# Altium PCB PCB1.PcbDoc
Units mm, origin at the board's own origin, x right, y up, seen from the top; angles counter-clockwise.
Board outline 55 x 55 mm, 2 copper layers (Top Layer, Bottom Layer), stack 1.74 mm thick; 47 components, 20 nets, 114 pads, 97 vias.
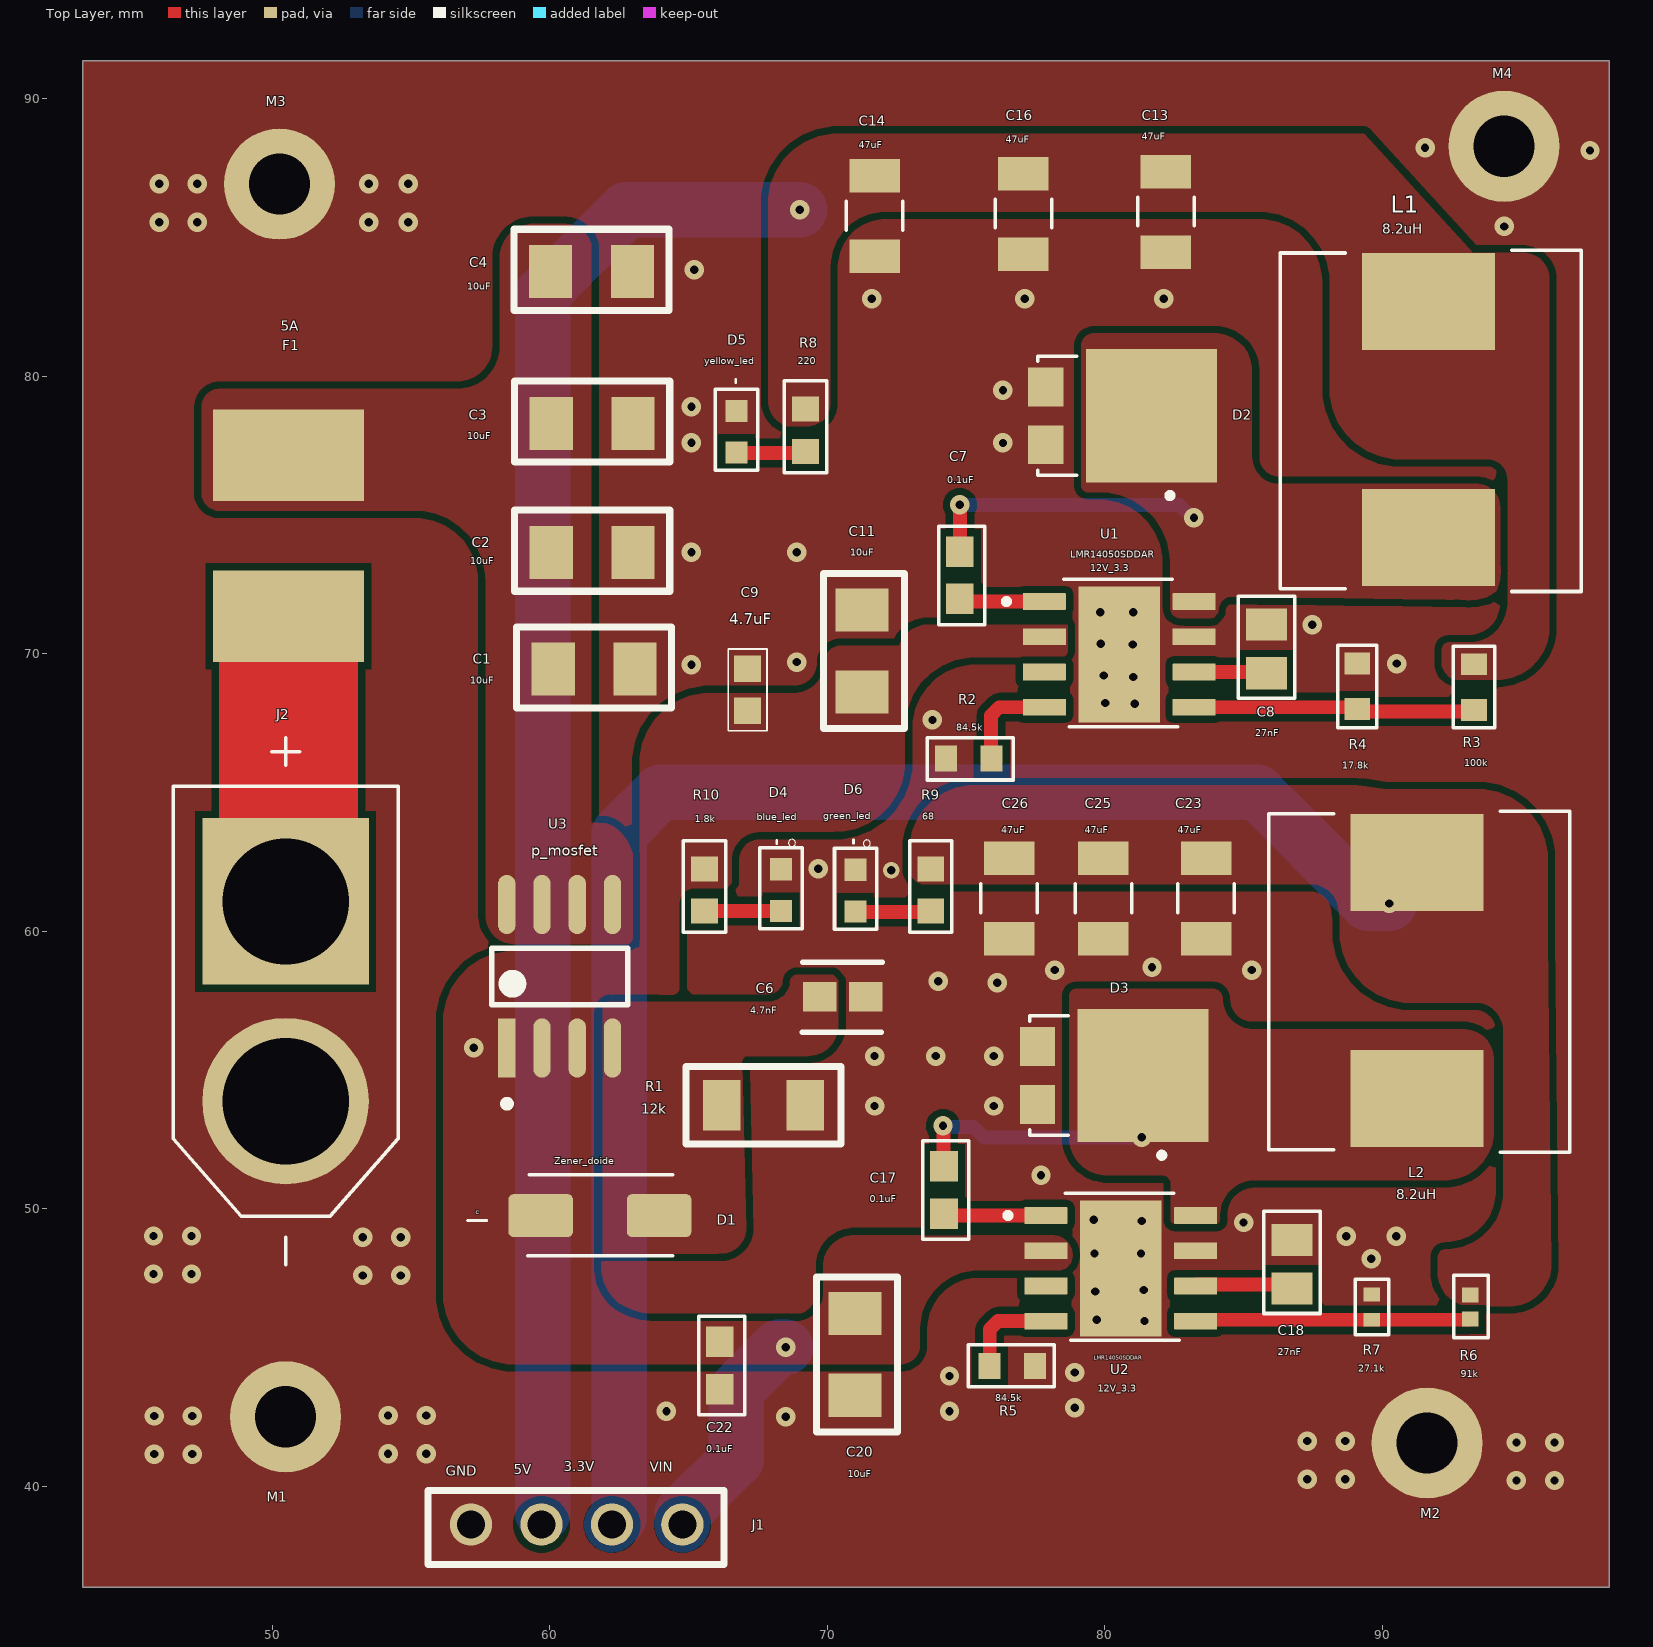
[diagram p0: Top Layer view]
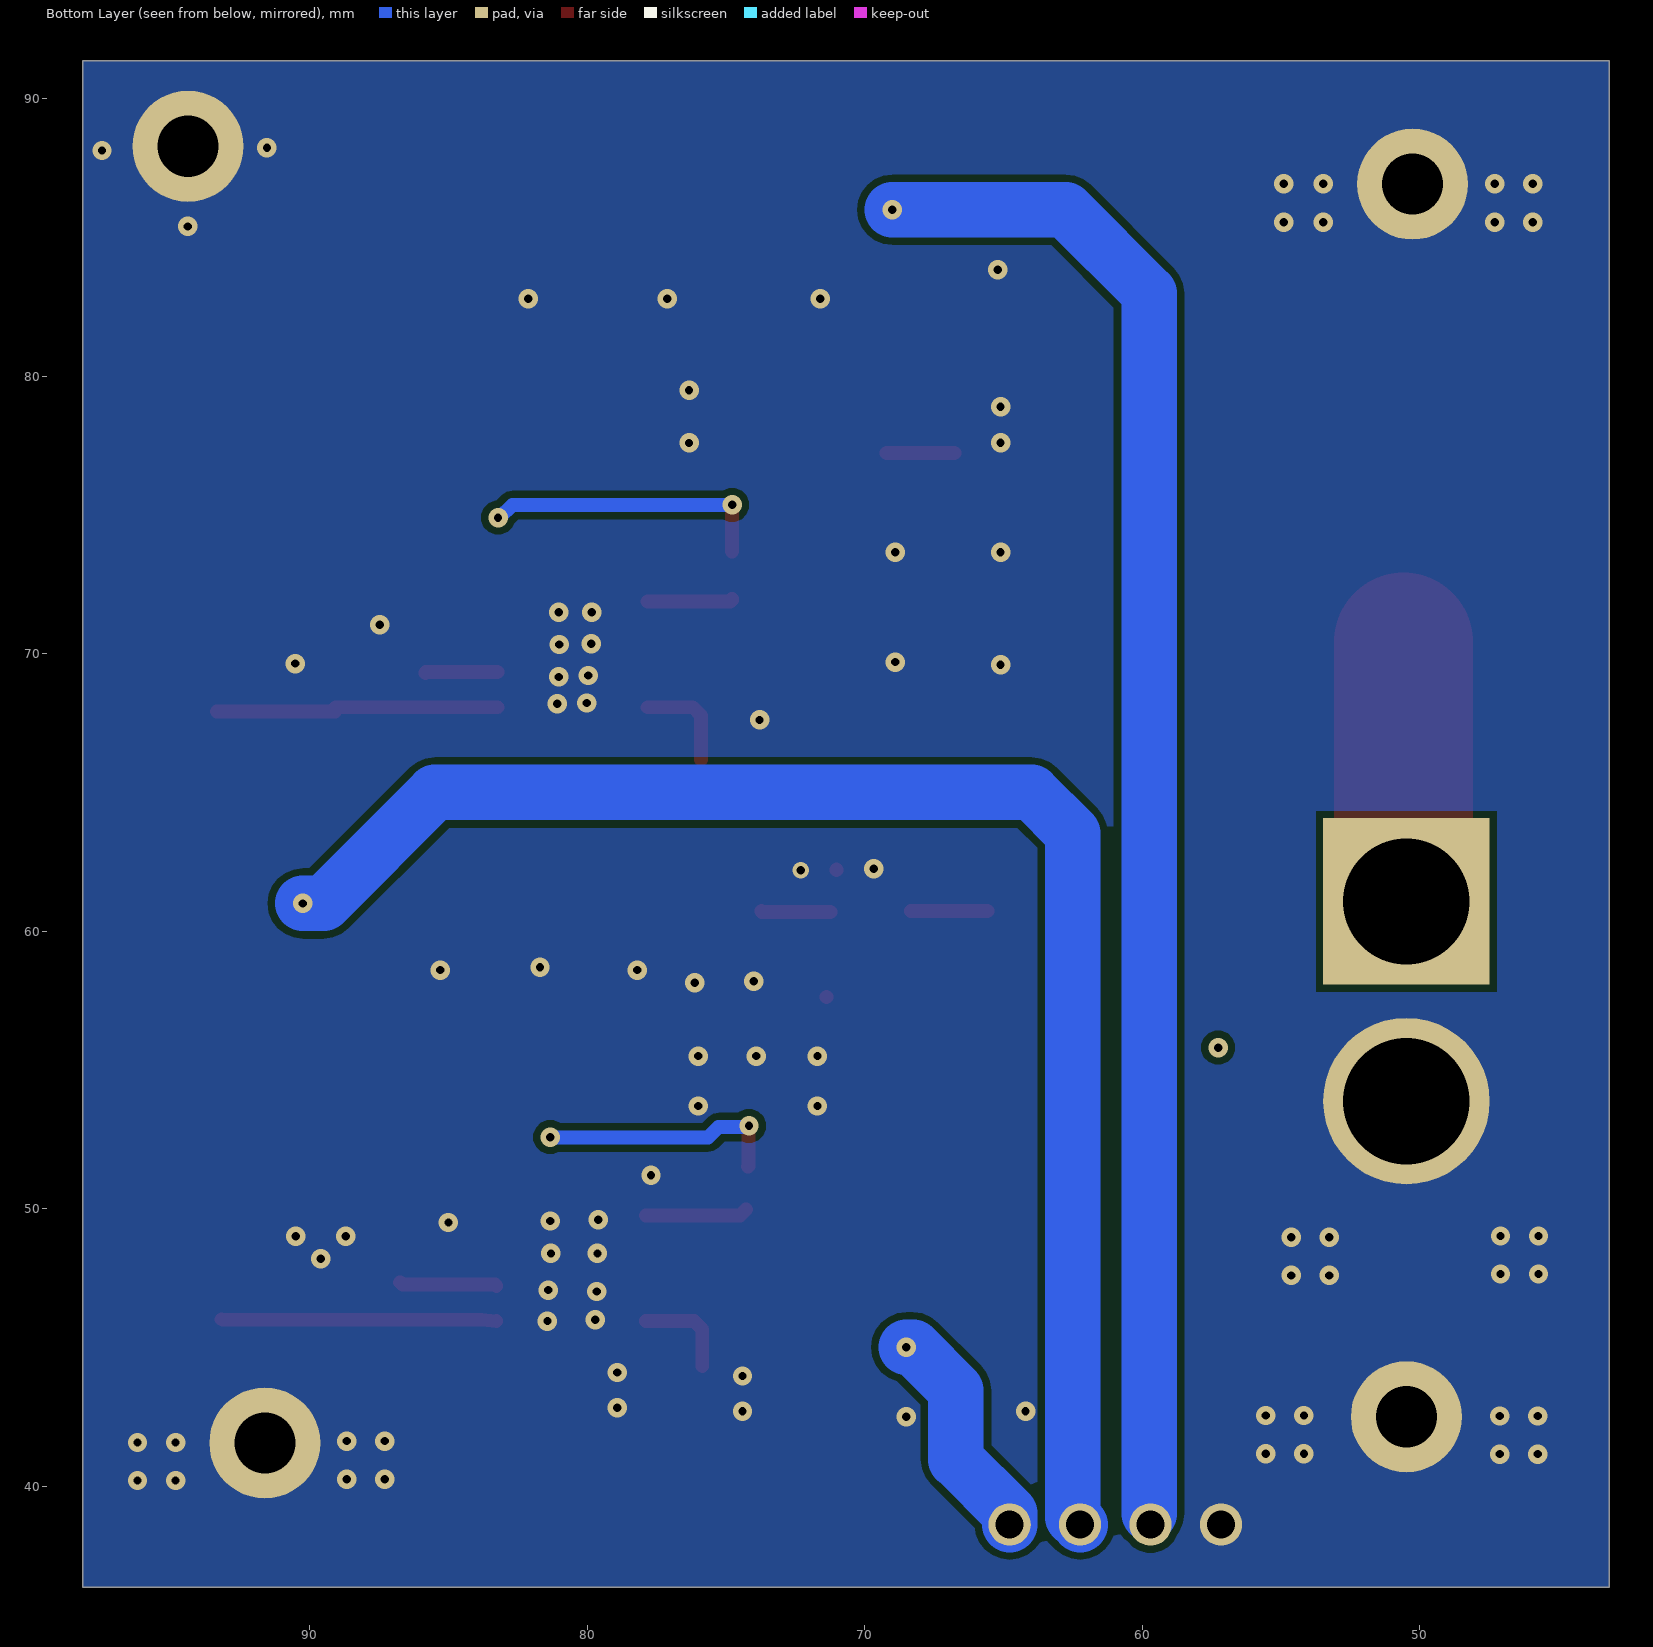
[diagram p1: Bottom Layer view, seen from below]
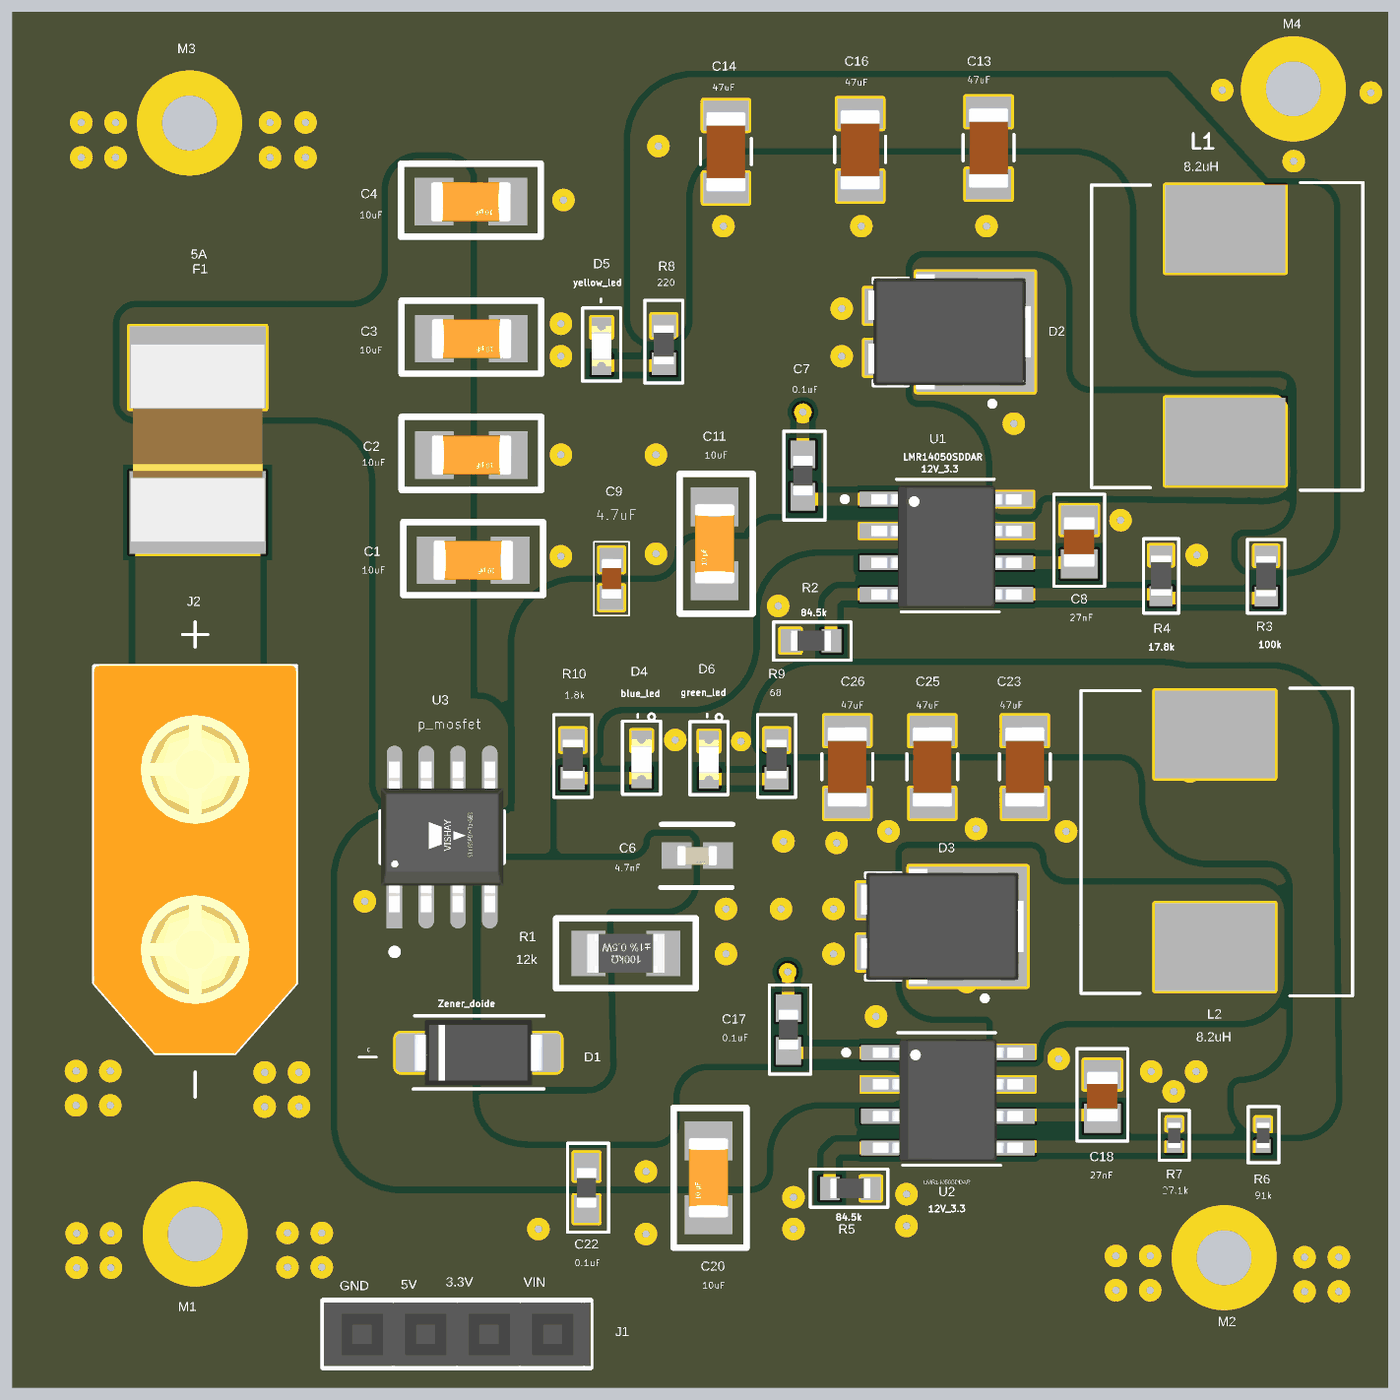
[diagram p2: 3D render of the assembled board from above, using the file's embedded part models]

## Layer stack, top to bottom
Top Solder: solder mask 0.0102, Solder Resist, Dk 3.5
Top Layer: signal copper 0.07
Dielectric 1: dielectric 1.6002, FR-4, Dk 4.8
Bottom Layer: signal copper 0.07
Bottom Solder: solder mask 0.0102, Solder Resist, Dk 3.5

## Board outline
43.171,36.364 43.171,91.364 98.171,91.364 98.171,36.364

## Design rules (kind name [scope] priority, off if disabled: settings)
Clearance [All] p1: gap=0.254 ignorepadtopadclearanceinfootprint=FALSE
HoleSize [All] p1: absolutevalues=TRUE maxlimit=5 minlimit=0.025 maxpercent=80.000 minpercent=20.000
MinimumSolderMaskSliver [All] p1: minsoldermaskwidth=0.2
PolygonConnect [All] p1: connectstyle=Direct reliefconductorwidth=0.254 reliefentries=4 polygonreliefangle="90 Angle" airgapwidth=0.254
RoutingVias [All] p1: holewidth=0.35 width=0.7 viastyle="Through Hole" minholewidth=0.2 minwidth=0.2 maxholewidth=0.3 maxwidth=0.7
SilkToSilkClearance [All] p1: silktosilkclearance=0.15
SilkToSolderMaskClearance [IsPad] p1: minsilkscreentomaskgap=0.15 clearancetoexposedcopper=TRUE
SolderMaskExpansion [All] p1: expansion=0.102 istentingtop=FALSE
SupplyNets "Schematic Supply Nets_4" [InNet('12V')] p1: voltage=0.000
SupplyNets "Schematic Supply Nets_3" [InNet('VIN')] p2: voltage=0.000
SupplyNets "Schematic Supply Nets_2" [InNet('3.3')] p3: voltage=0.000
SupplyNets "Schematic Supply Nets_1" [InNet('GND')] p4: voltage=0.000
SupplyNets "Schematic Supply Nets" [InNet('5V5')] p5: voltage=0.000
Width [All] p1: maxlimit=5 minlimit=0.254 preferedwidth=0.5
26 further rules are at their usual default settings.

## Classes and differential pairs
polygon class PolygonClass_1: 3.3_L01_P023
component class Sheet2: C17 C18 C20 C22 C23 C25 C26 D3 D4 D5 D6 J1 L2 M1 M2 M3 M4 R5 R6 R7 R8 R9 R10 U2
component class Sheet1: C1 C2 C3 C4 C6 C7 C8 C9 C11 C13 C14 C16 D1 D2 F1 J2 L1 R1 R2 R3 R4 U1 U3

## Components (designator, comment, footprint, x,y, rotation, side; value= is the part's Value field where it differs from the comment)
C1 "10uF,50V" CL31A106KBHNNNE 61.544,69.469 r180 top
C2 "10uF,50V" CL31A106KBHNNNE 61.475,73.675 r180 top
C3 "10uF,50V" CL31A106KBHNNNE 61.475,78.325 r180 top
C4 "10uF,50V" CL31A106KBHNNNE 61.45,83.8 r180 top
C6 "4.7nF,50V" C0603C472F5GACTU 70.574,57.608 r180 top
C7 "0.1uf,25V" CC0603KRX7R8BB104 74.825,72.85 r90 top
C8 "27nF,16V" C0805C273K4HACAUTO 85.825,70.175 r90 top
C9 "4.7uF,25V" GRM188R61E475KE11D 67.125,68.7 r270 top
C11 "2.2uF,100V" CL31A106KBHNNNE 71.275,70.15 r90 top
C13 "47uF,10V" GRM31CR61A476ME15L 82.125,85.9 r90 top
C14 "47uF,10V" GRM31CR61A476ME15L 71.625,85.75 r90 top
C16 "47uF,10V" GRM31CR61A476ME15L 76.989,85.829 r90 top
C17 "0.1uf,25V" CC0603KRX7R8BB104 74.25,50.7 r90 top
C18 "27nF,16V" C0805C273K4HACAUTO 86.75,48 r90 top
C20 "2.2uF,100V" CL31A106KBHNNNE 71.025,44.801 r90 top
C22 "0.1uf,25V" CC0603KRX7R8BB104 66.175,44.375 r90 top
C23 "47uF,10V" GRM31CR61A476ME15L 83.575,61.15 r90 top
C25 "47uF,10V" GRM31CR61A476ME15L 79.875,61.15 r90 top
C26 "47uF,10V" GRM31CR61A476ME15L 76.475,61.15 r90 top
D1 "12V" SMAZ12-13-F 61.8,49.7 r0 top
D2 "20V,8A" SS12P2L-M3/86A 79.772,78.575 r270 top
D3 "20V,8A" SS12P2L-M3/86A 79.475,54.8 r270 top
D4 "Blue_led" XL-1608UBC-04 68.375,61.432 r270 top
D5 "yellow_led" XL-1608UWC-04 66.726,78.003 r270 top
D6 "green_led" LTST-C190GKT 71.018,61.462 r270 top
F1 "Fuse,5A" 2920L500/16MR 50.575,74.25 r90 top
J1 "Through Hole,P=2.54mm" PBC04SAAN 60.939,38.616 r180 top
J2 "XT60" XT60-M 50.475,57.475 r270 top
L1 "8.2uH, 7A" SCIHP1040-8R2M 91.669,78.443 r90 top
L2 "8.2uH, 7A" SCIHP1040-8R2M 91.25,58.225 r90 top
M1 "2..2mm" "MOUNTINH HOLE" 50.5,42.5 r0 top
M2 "2..2mm" "MOUNTINH HOLE" 91.643,41.554 r0 top
M3 "2..2mm" "MOUNTINH HOLE" 50.275,86.925 r0 top
M4 "2..2mm" "MOUNTINH HOLE" 94.411,88.29 r0 top
R1 "12K,0.5W" CRGP1206F12K 67.725,53.7 r180 top
R2 "84.5k,100mW" RC0603FR-0784K5L 75.1,66.225 r0 top
R3 "100k, 0.1W" RT0603CRC07100KL 93.3,68.8 r90 top
R4 "17.8kohm,100mw" RC0603FR-0717K8L 89.1,68.825 r270 top
R5 "84.5k,100mW" RC0603FR-0784K5L 76.67,44.325 r180 top
R6 "91K,62mW" RC0402FR-0791KL 93.175,46.449 r90 top
R7 "27.1k,63mW" TNPW040227K1BEED 89.625,46.449 r270 top
R8 "220,100mW" RMCF0603JT220R 69.215,78.054 r90 top
R9 "68,100mW" RC0603JR-0768RL 73.725,61.49 r90 top
R10 "1.8K,100mW" RMCF0603JT1K80 65.575,61.49 r90 top
U1 "DC-DC Buck Regulator, 5 A" LMR14050SDDAR 80.521,69.977 r0 top
U2 "DC-DC Buck Regulator, 5 A" LMR14050SDDAR 80.575,47.85 r0 top
U3 "P channel mosfet" SI4435FDY-T1-GE3 60.4,58.381 r90 top

## Footprints (in the part's own frame and the unit in brackets; to place one, negate y for a bottom-side part, rotate by r counter-clockwise, add the part's x,y. Pads: shape width x height; smd on the part's side, far side on the other; paste and mask are expansions set on the pad)
2920L500/16MR [mm] "C207091"
  rect 3.3x5.45 smd: 1(-2.9,0) 2(2.9,0)
  body extent -4.06,-2.67 3.81,2.67, height 1.52
C0603C472F5GACTU [mil] "50V 4.7nF C0G 0603 Ceramic Capacitors ROHS"
  rect 47.5x41.66 smd paste+0 mask+0: 1(-31.53,-0.98) 2(33.5,-0.98)
  silkscreen extent -55,-50 58,49, body extent -75,-42 77,40, height 10
C0805C273K4HACAUTO [mm] "16V 27nF X8R ±10% 0805 Ceramic Capacitors ROHS"
  rect 1.16x1.47 smd: 1(-0.875,0) 2(0.875,0)
  silkscreen extent -1.78,-1.02 1.91,1.02, body extent -1,-0.62 1,0.63, height 1.2
CC0603KRX7R8BB104 [mm] "25V 100nF X7R ±10% 0603 Ceramic Capacitors ROHS"
  rect 1.1x1 smd: 1(-0.875,0.05) 2(0.825,0.05)
  silkscreen extent -1.8,-0.84 1.75,0.81, body extent -0.83,-0.35 0.77,0.45, height 0.9
CL31A106KBHNNNE [mm] "50V 10uF X5R ±10% 1206 Ceramic Capacitors ROHS"
  rect 1.554x1.906 smd paste+0 mask+0: 1(-1.526,0.025) 2(1.426,0.025)
  silkscreen extent -2.84,-1.5 2.74,1.42, body extent -2.8,-1.43 2.7,1.48, height 0.25
CRGP1206F12K [mm] "12 kOhms ±1% 0.5W, 1/2W Chip Resistor 1206 (3216 Metric) Automotive AEC-Q200, Pulse Withstanding Thick Film"
  rect 1.356x1.81 smd paste+0 mask+0: 1(-1.476,-0.025) 2(1.526,-0.025)
  silkscreen extent -2.77,-1.42 2.82,1.37, body extent -2.65,-1.43 2.7,1.38, height 0.25
GRM31CR61A476ME15L [mm] "10V 47uF X5R ±20% 1206 Ceramic Capacitors ROHS"
  rect 1.21x1.82 smd: 1(-1.425,-0.075) 2(1.475,-0.075)
  silkscreen extent -0.48,-1.09 0.56,0.94, body extent -1.57,-0.88 1.63,0.72, height 1.8
GRM188R61E475KE11D [mm] "25V 4.7uF X5R ±10% 0603 Ceramic Capacitors ROHS"
  rect 0.96x0.97 smd: 1(-0.755,0) 2(0.755,0)
  silkscreen extent -1.48,-0.7 1.48,0.7, body extent -0.8,-0.4 0.8,0.4, height 0.95
LMR14050SDDAR [mm] "SIMPLE SWITCHER® 40-V, 5-A, 2.2-MHz step-down converter with 40-μA IQ"
  rrect5% 1.55x0.6 smd mask+0: 1(-2.7,1.905) 2(-2.7,0.635) 3(-2.7,-0.635) 4(-2.7,-1.905) 5(2.7,-1.905) 6(2.7,-0.635) 7(2.7,0.635) 8(2.7,1.905)
  rect 2.95x4.9 smd paste-3 mask+0: 9(0,0)
  silkscreen extent -4.17,-2.6 2.1,2.7, body extent -3,-2.45 3,2.45, height 1.7
LTST-C190GKT [mm] "20mA Yellow Green 2.1V 100mW 0603 LED Indication - Discrete ROHS"
  rect 0.8x0.8 smd: A(0.75,0) C(-0.75,0)
  silkscreen extent -1.84,-0.76 1.4,0.76, body extent -0.8,-0.4 0.8,0.4, height 0.81
"MOUNTINH HOLE" [mm] "2.2mm"
  round 4 hole 2.2: 1(-0.025,0)
PBC04SAAN [mil]
  round 60 hole 40 paste-99999 mask+0: 1(-150.98,-0.02) 2(-50.98,-0.02) 3(49.02,-0.02) 4(149.02,-0.02)
  silkscreen extent -210,-48 210,57, body extent -211,-45 209,55, height 335
RC0402FR-0791KL [mm] "91kΩ 62.5mW 50V ±100ppm/℃ Thick Film Resistor ±1% 0402 Chip Resistor - Surface Mount ROHS"
  rect 0.54x0.6 smd: 1(-0.432,0) 2(0.432,0)
  silkscreen extent -1.1,-0.63 1.14,0.6, body extent -0.5,-0.25 0.5,0.25, height 0.4
RC0603FR-0717K8L [mm] "100mW 17.8kΩ 75V ±100ppm/℃ Thick Film Resistor ±1% 0603 Chip Resistor - Surface Mount ROHS"
  rect 0.79x0.93 smd: 1(-0.82,0) 2(0.82,0)
  silkscreen extent -1.48,-0.7 1.5,0.7, body extent -0.8,-0.4 0.8,0.4, height 0.55
RC0603FR-0784K5L [mm] "100mW 84.5kΩ 75V ±100ppm/℃ Thick Film Resistor ±1% 0603 Chip Resistor - Surface Mount ROHS"
  rect 0.79x0.93 smd: 1(-0.82,0) 2(0.82,0)
  silkscreen extent -1.5,-0.77 1.6,0.75, body extent -0.8,-0.4 0.8,0.4, height 0.55
RC0603JR-0768RL [mm] "100mW 68Ω 75V ±100ppm/℃ Thick Film Resistor ±5% 0603 Chip Resistor - Surface Mount ROHS"
  rect 0.9x0.97 smd: 1(-0.76,0) 2(0.76,0)
  silkscreen extent -1.52,-0.76 1.78,0.76, body extent -0.77,-0.4 0.77,0.4, height 0.55
RMCF0603JT1K80 [mm] "100mW 1.8kΩ 75V ±200ppm/℃ Thick Film Resistor ±5% 0603 Chip Resistor - Surface Mount ROHS"
  rect 0.9x0.97 smd: 1(-0.76,0) 2(0.76,0)
  silkscreen extent -1.52,-0.76 1.78,0.76, body extent -0.77,-0.4 0.78,0.4, height 0.55
RMCF0603JT220R [mm] "100mW 220Ω 75V ±200ppm/℃ Thick Film Resistor ±5% 0603 Chip Resistor - Surface Mount ROHS"
  rect 0.9x0.97 smd: 1(-0.76,0) 2(0.76,0)
  silkscreen extent -1.52,-0.76 1.78,0.76, body extent -0.77,-0.4 0.77,0.4, height 0.55
RT0603CRC07100KL [mm] "100 kOhms ±0.25% 0.1W, 1/10W Chip Resistor 0603 (1608 Metric) - Thin Film"
  rect 0.79x0.93 smd: 1(-0.82,0) 2(0.82,0)
  silkscreen extent -1.48,-0.75 1.48,0.75, body extent -0.8,-0.4 0.8,0.4, height 0.55
SCIHP1040-8R2M [mm] "7A 8.2uH ±20% 10A 31mΩ SMD,11.5x10.2mm Fixed Inductors ROHS"
  rect 3.5x4.8 smd: 1(-4.25,0) 2(4.25,0)
  silkscreen extent -6.2,-5.5 6.1,5.35, body extent -5.78,-5.1 5.75,5.13, height 1.52
SI4435FDY-T1-GE3 [mm] "30V 12.6A 19mΩ@10V,9A 2.2W 2.2V 1 P-Channel SO-8 Single FETs, MOSFETs ROHS"
  rect 2.135x0.625 smd paste+0 mask+0: 1(-2.592,1.955)
  rrect100% 2.135x0.625 smd paste+0 mask+0: 2(-2.592,0.685) 3(-2.592,-0.585) 4(-2.592,-1.855) 5(2.579,-1.855) 6(2.579,-0.585) 7(2.579,0.685) 8(2.579,1.955)
  silkscreen extent -4.72,-2.4 1.01,2.5, body extent -4.16,-2.9 4.15,3, height 0.25
SMAZ12-13-F [mm] "Independent 11.4V~12.6V 1W 12V SMA Single Zener Diodes ROHS"
  rrect25% 2.33x1.55 smd: 1(-2.135,0.05) 2(2.135,0.05)
  silkscreen extent -4.77,-1.4 2.63,1.53, body extent -2.6,-1.25 2.6,1.35, height 2.4
SS12P2L-M3/86A [mm] "20V 560mV@12A 12A TO-277A Single Diodes ROHS"
  rect 1.4x1.27 smd: 1(1.04,-1.903) 2(-1.04,-1.903)
  rect 4.8x4.72 smd: 3(0,1.903)
  silkscreen extent -2.15,-2.19 2.97,2.68, body extent -2.3,-2.38 2.3,4.13, height 1.21
TNPW040227K1BEED [mm] "63mW 27.1kΩ ±25ppm/℃ Thin Film Resistor ±0.1% 0402 Chip Resistor - Surface Mount ROHS"
  rect 0.49x0.6 smd: 1(-0.457,0) 2(0.457,0)
  silkscreen extent -1,-0.6 1,0.6, body extent -0.5,-0.25 0.5,0.25, height 0.4
XL-1608UBC-04 [mm] "20mA 3.3V Blue 70mW 0603 LED Indication - Discrete ROHS"
  rect 0.8x0.8 smd: A(0.7,-0.05) C(-0.8,-0.05)
  silkscreen extent -1.88,-0.81 1.35,0.71, body extent -0.85,-0.45 0.75,0.35, height 0.81
XL-1608UWC-04 [mm] "20mA 13700K~33000K White 2.7V 70mW 0603 LED Indication - Discrete ROHS"
  rect 0.8x0.8 smd: A(0.75,0) C(-0.75,0)
  silkscreen extent -1.89,-0.76 1.4,0.76, body extent -0.8,-0.4 0.8,0.4, height 0.81
XT60-M [mm] "Plug; DC supply; XT60; male; PIN: 2; for cable; soldered; 30A; 500V"
  round 6 hole 4.55: N(3.6,0)
  rect 6x6 / inner round 6 / far side rect 6x6 hole 4.55: P(-3.6,0)
  silkscreen extent -9.5,-4.05 9.5,4.05, body extent -7.75,-4.05 7.75,4.05, height 16

## Part data
C1 C2 C3 C4: library part CL31A106KBHNNNE, "CAP CER 10uF 50V X5R 1206"
C6: library part C0603C472F5GACTU, "50V 4.7nF C0G 0603 Ceramic Capacitors ROHS", supplier part number=C22418770, manafucturer part number=C0603C472F5GACTU
C7 C17 C22: library part CC0603KRX7R8BB104, "25V 100nF X7R ±10% 0603 Ceramic Capacitors ROHS", supplier part number=C92490, manafucturer part number=CC0603KRX7R8BB104
C8 C18: library part C0805C273K4HACAUTO, "16V 27nF X8R ±10% 0805 Ceramic Capacitors ROHS", supplier part number=C2218666, manafucturer part search=C0805C273K4HACAUTO
C9: library part GRM188R61E475KE11D, "25V 4.7uF X5R ±10% 0603 Ceramic Capacitors ROHS", supplier part number=C90057, manafucturer part number=GRM188R61E475KE11D
C11 C20: library part CL31B225KCHSNNE, "100V 2.2uF X7R ±10% 1206 Ceramic Capacitors ROHS", supplier part number=C170101, manafucturer part number=CL31B225KCHSNNE
C13 C14 C16 C23 C25 C26: library part GRM31CR61A476ME15L, "10V 47uF X5R ±20% 1206 Ceramic Capacitors ROHS", supplier part number=C94034, manafucturer part number=GRM31CR61A476ME15L
D1: library part SMAZ12-13-F, "DIODE ZENER 12V 1W SMA", supplier part number=C110523, manafucturer part number=SMAZ12-13-F
D2 D3: library part SS12P2L-M3/86A, "20V 560mV@12A 12A TO-277A Single Diodes ROHS", supplier part number=C3758037, manafucturer part number=SS12P2L-M3/86A
D4: library part XL-1608UBC-04, "20mA 3.3V Blue 70mW 0603 LED Indication - Discrete ROHS", supplier part number=C965807, manafucturer part number=XL-1608UBC-04
D5: library part XL-1608UWC-04, "20mA 13700K~33000K White 2.7V 70mW 0603 LED Indication - Discrete ROHS", manafucturer part search=XL-1608UWC-04, supplier part search=C965808
D6: library part LTST-C190GKT, "63mW 27.1kΩ ±25ppm/℃ Thin Film Resistor ±0.1% 0402 Chip Resistor - Surface Mount ROHS", supplier part number=C4266737, manafucturer part search=TNPW040227K1BEED
F1: library part 2920L500/16MR, "16V 5A 40A 10A 5mΩ 2920 PTC Resettable Fuses ROHS", supplier part number=C207091, manafucturer part search=2920L500/16MR
J1: library part PBC04SAAN, "Black 4P Tin 2.54mm Phosphor Bronze 3A 1 Through Hole -65℃~+125℃ Through Hole,P=2.54mm Headers, Male Pins ROHS", supplier part number=C5707257, manafucturer part search=PBC04SAAN
J2: library part XT60-M, "Plug; DC supply; XT60; male; PIN: 2; for cable; soldered; 30A; 500V", SNAPEDA_LINK=https://www.snapeda.com/parts/XT60-M/AMASS/view-part/?ref=snap
L1 L2: library part SCIHP1040-8R2M, "7A 8.2uH ±20% 10A 31mΩ SMD,11.5x10.2mm Fixed Inductors ROHS", supplier part number=C6293289, manafucturer part number=SCIHP1040-8R2M
M1 M2 M3 M4: library part mountin_holes, "mounting hole 2.2m"
R1: library part CRGP1206F12K, "12 kOhms ±1% 0.5W, 1/2W Chip Resistor 1206 (3216 Metric) Automotive AEC-Q200, Pulse Withstanding Thick Film", supplier part number=C2082462, manufucturer part number=CRGP1206F12K
R2 R5: library part RC0603FR-0784K5L, "100mW 84.5kΩ 75V ±100ppm/℃ Thick Film Resistor ±1% 0603 Chip Resistor - Surface Mount ROHS", supplier part number=C326920, manafucturer part number=RC0603FR-0784K5L
R3: library part "100 kOhms ±0.25% 0.1W, 1/10W Chip Resistor 0603 (1608 Metric) - Thin Film", "100 kOhms ±0.25% 0.1W, 1/10W Chip Resistor 0603 (1608 Metric) - Thin Film", manafucturer part number=RT0603CRE07100KL, supplier part number=C862453
R4: library part RC0603FR-0717K8L, "100mW 17.8kΩ 75V ±100ppm/℃ Thick Film Resistor ±1% 0603 Chip Resistor - Surface Mount ROHS", supplier part number=C185364, manafucturer part number=RC0603FR-0717K8L
R6: library part RC0402FR-0791KL, "91kΩ 62.5mW 50V ±100ppm/℃ Thick Film Resistor ±1% 0402 Chip Resistor - Surface Mount ROHS", supplier part number=C327323, manafucturer part search=RC0402FR-0791KL
R7: library part TNPW040227K1BEED, "63mW 27.1kΩ ±25ppm/℃ Thin Film Resistor ±0.1% 0402 Chip Resistor - Surface Mount ROHS", manafucturer number=TNPW040227K1BEED, supplier number=C4266737
R8: library part RMCF0603JT220R, "100mW 220Ω 75V ±200ppm/℃ Thick Film Resistor ±5% 0603 Chip Resistor - Surface Mount ROHS", manafucturer part search=RMCF0603JT220R, supplier part search=C2484076
R9: library part RC0603JR-0768RL, "100mW 68Ω 75V ±100ppm/℃ Thick Film Resistor ±5% 0603 Chip Resistor - Surface Mount ROHS", manafucturer part search=RC0603JR-0768RL, supplier part search=C163413
R10: library part RMCF0603JT1K80, "100mW 1.8kΩ 75V ±200ppm/℃ Thick Film Resistor ±5% 0603 Chip Resistor - Surface Mount ROHS", manafucturer part search=RMCF0603JT1K80, supplier part search=C2483889
U1 U2: library part LMR14050SDDAR, "2.5MHz 5A Buck Adjustable 800mV~28V 1 SOIC-8-EP Voltage Regulators - DC DC Switching Regulators ROHS", supplier part number=C155484, manafucturer part number=LMR14050SDDAR
U3: library part SI4435FDY-T1-GE3, "30V 12.6A 19mΩ@10V,9A 2.2W 2.2V 1 P-Channel SO-8 Single FETs, MOSFETs ROHS", supplier part number=C727418, manafucturer part search=SI4435FDY-T1-GE3

## Via types
v1: diameter 0.7, hole 0.3, Top Layer to Bottom Layer, 96 vias
v2: diameter 0.6, hole 0.3, Top Layer to Bottom Layer, 1 vias

## Nets (pads, with @x,y where several pads share a name; then routed paths per layer and width w, separated by ;. In a path a pad name is that pad's centre, name@x,y a point inside that pad or via, vN(x,y) a via of type N, cw(c..) or ccw(c..) an arc to the next point about the centre after c; other vN are vias at no path point)
3.3: C23.2 C25.2 C26.2 J1.2 L2.2 R6.2 R9.2 | length 55
  Bottom Layer w2: J1.2 62.496,38.878 62.496,40.537 62.504,40.545 62.504,63.536 63.968,65 85.5,65 89.5,61 v1(90.25,61)
5V5: C13.2 C14.2 C16.2 J1.3 L1.2 R3.2 R8.2 | length 54.5
  Bottom Layer w2: J1.3@59.75,39 59.75,83 62.75,86 v1(69,86)
12V: C1.2 C2.2 C3.2 C4.2 F1.2 U3.5 U3.6 U3.7 U3.8
B1: C7.1 U1.1 | length 3.1
  Top Layer w0.5: C7.1 ccw(c74.868,71.975) 74.868,71.882 U1.1
B2: C17.1 U2.1 | length 3.7
  Top Layer w0.5: C17.1@74.275,49.975 74.495,49.755 U2.1
FB: R3.1 R4.2 U1.5 | length 10.2
  Top Layer w0.5: U1.5 89.033,68.072 cw(c89.033,68.005) R4.2 ; R4.2@89.089,67.925 R3.1@93.339,67.925
FB_2: R6.1 R7.2 U2.5 | length 9.9
  Top Layer w0.5: U2.5 83.8,45.995 93.125,45.997 R6.1
GL: D6.A R9.1 | length 2.5
  Top Layer w0.5: D6.A@71.225,60.694 73.689,60.694 ccw(c73.689,60.73) R9.1
GND: C1.1 C2.1 C3.1 C4.1 C6.1 C8.2 C9.1 C11.2 C13.1 C14.1 C16.1 C18.2 C20.1 C22.1 C23.1 C25.1 C26.1 D2.1 D2.2 D3.1 D3.2 D4.C D5.C D6.C J1.4 J2.N M1.1 M2.1 M3.1 M4.1 R1.1 R2.1 R4.1 R5.1 R7.1 U1.7 U1.9 U2.7 U2.9 | length 0
  Top Layer w0.5: D6.C D6.C@71.018,62.225 ; C6.1 C6.1@71.383,57.624
  other v1: 94.835,40.202 96.206,40.202 87.291,40.253 88.663,40.253 45.736,41.156 47.108,41.156 54.167,41.173 55.539,41.173 94.835,41.574 96.206,41.574 87.291,41.624 88.663,41.624 68.5,42.5 45.736,42.527 47.108,42.527 54.167,42.544 55.539,42.544 64.2,42.7 74.4,42.7 78.918,42.824 74.4,43.97 78.918,44.094 81.432,45.949 79.705,45.999 79.654,47.015 81.407,47.066 53.255,47.593 54.627,47.593 45.711,47.644 47.083,47.644 89.6,48.2 79.629,48.387 81.305,48.387 53.255,48.965 54.627,48.965 88.7,49 90.5,49 45.711,49.016 47.083,49.016 85,49.5 81.331,49.555 79.604,49.606 77.7,51.2 71.7,53.7 76,53.7 71.7,55.5 73.9,55.5 76,55.5 76.124,58.141 74,58.2 78.2,58.6 85.3,58.6 81.7,58.7 69.672,62.255 73.787,67.615 81.077,68.199 80.01,68.224 81.026,69.164 79.959,69.215 65.1,69.6 90.526,69.647 68.9,69.7 81.001,70.333 79.858,70.358 87.478,71.044 79.832,71.501 81.026,71.501 65.1,73.66 68.9,73.66 65.1,77.6 76.327,77.597 65.1,78.9 76.327,79.502 71.6,82.8 77.114,82.8 82.118,82.8 65.202,83.845 94.4,85.4 45.923,85.547 47.295,85.547 53.467,85.547 54.889,85.547 45.923,86.944 47.295,86.944 53.467,86.944 54.889,86.944 97.485,88.138 91.542,88.24
  other v2: 72.3,62.2
LB: D4.A R10.1 | length 2.8
  Top Layer w0.5: R10.1 68.325,60.73 D4.A
LY: D5.A R8.1 | length 2.4
  Top Layer w0.5: D5.A@66.765,77.229 R8.1@69.215,77.229
NetC6_2: C6.2 D1.2 R1.2 U3.4
RT_1: R2.2 U1.4 | length 3.6
  Top Layer w0.5: R2.2@75.9,66.189 75.9,67.779 76.193,68.072 U1.4
RT_2: R5.2 U2.4 | length 3.5
  Top Layer w0.5: R5.2 75.85,45.652 76.143,45.945 U2.4
SS_1: C8.1 U1.6 | length 2.6
  Top Layer w0.5: U1.6 85.783,69.342 cw(c85.783,69.3) C8.1
SS_2: C18.1 U2.6 | length 3.5
  Top Layer w0.5: U2.6 83.325,47.265 86.665,47.265 C18.1@86.75,47.35
SW_1: C7.2 D2.3 L1.1 U1.8 | length 10.3
  Top Layer w0.5: C7.2 v1(74.775,75.364)
  Bottom Layer w0.5: v1(74.775,75.364) 82.696,75.364 83.156,74.905 v1(83.21,74.905)
SW_2: C17.2 D3.3 L2.1 U2.8 | length 8.8
  Top Layer w0.5: v1(74.168,52.984) 74.184,52.968 74.184,51.541 C17.2
  Bottom Layer w0.5: v1(74.168,52.984) 74.206,52.946 75.26,52.946 75.644,52.562 81.315,52.562 v1(81.331,52.578)
VIN: C9.2 C11.1 C20.2 C22.2 D1.1 J1.1 R10.2 U1.2 U2.2 U3.1 U3.2 U3.3 | length 8.1
  Bottom Layer w2: J1.1 64.774,39.024 66.708,40.958 66.708,43.458 68.25,45 v1(68.5,45)
  other v1: 57.258,55.803
VS: F1.1 J2.P | length 9.2
  Top Layer w5: J2.P@50.575,61.225 F1.1@50.575,70.434
pads on no net: U1.3 U2.3

## Polygon pours and split planes (outlines as drawn)
GND on Top Layer "GND_L01_P052" (solid, remove dead copper, pour order 52): 43.171,36.364 43.171,91.364 98.171,91.364 98.171,36.364
VIN on Top Layer "VIN_L01_P042" (solid, pour order 42): 57.379,51.156 59.842,51.156 cw(c59.842,49.911) 61.087,49.911 61.087,48.616 ccw(c63.779,48.641) 63.779,45.948 68.936,45.948 ccw(c68.86,46.938) 69.85,47.015 69.85,47.93 cw(c70.968,47.93) 70.968,49.047 78.105,49.047 cw(c78.105,48.311) 78.842,48.311 cw(c78.308,48.311) 78.308,47.777 75.438,47.777 ccw(c75.438,45.669) 73.33,45.669 73.33,45.06 cw(c72.67,45.059) 72.669,44.399 58.699,44.399 cw(c58.699,46.939) 56.159,46.939 56.159,50.648 cw(c56.642,50.648) 56.642,51.13 57.404,51.13
VIN on Top Layer "VIN_L01_P037" (solid, pour order 37): 63.231,59.4 63.231,66.04 cw(c65.771,66.04) 65.771,68.58 68.783,68.58 ccw(c68.783,69.698) 69.901,69.698 cw(c70.485,69.698) 70.485,70.282 76.251,70.282 ccw(c76.251,70.993) 76.962,70.993 cw(c77.013,70.993) 77.013,71.044 78.613,71.044 cw(c78.613,70.993) 78.664,70.993 78.664,70.129 cw(c78.41,70.129) 78.41,69.875 75.336,69.875 ccw(c75.336,67.335) 72.796,67.335 72.796,66.116 cw(c70.256,66.116) 70.256,63.576 67.564,63.576 ccw(c67.564,62.56) 66.548,62.56 66.548,61.722 cw(c66.37,61.722) 66.37,61.544 65.202,61.544 ccw(c65.202,61.011) 64.668,61.011 64.668,57.963 cw(c64.415,57.963) 64.415,57.709 63.946,57.709
3.3 on Top Layer "3.3_L01_P023" (solid, pour order 23): 95.174,58.293 ccw(c88.65,58.729) 89.085,65.253 75.286,65.253 ccw(c75.286,62.941) 72.974,62.941 72.974,62.23 ccw(c73.508,62.23) 73.508,61.697 87.402,61.697 cw(c87.402,60.655) 88.443,60.655 ccw(c88.799,60.655) 88.799,60.3 88.443,60.3 ccw(c92.816,62.677)
3.3 on Top Layer "3.3_L01_P050" (solid, pour order 50): 89.579,65.119 93.421,65.119 cw(c93.421,62.579) 95.961,62.579 95.961,58.776 ccw(c94.141,58.776) 94.141,60.596 93.134,60.596
3.3 on Top Layer "3.3_L01_P049" (solid, pour order 49): 88.472,61.019 88.472,59.969 ccw(c91.012,59.969) 91.012,57.429 93.345,57.429 cw(c93.345,56.413) 94.361,56.413 94.361,50.597 cw(c92.304,50.597) 92.304,48.539 ccw(c92.304,48.235) 91.999,48.235 91.999,47.701 ccw(c93.218,47.701) 93.218,46.482 94.59,46.482 ccw(c94.59,47.981) 96.088,47.981 95.961,59.756 ccw(c93.581,58.174) 91.999,60.554
5V5 on Top Layer "5V5_L01_P048" (solid, pour order 48): 88.113,80.341 88.113,79.553 ccw(c90.653,79.553) 90.653,77.013 93.777,77.013 cw(c93.777,76.276) 94.513,76.276 94.513,71.806 cw(c93.116,71.806) 93.116,70.409 92.405,70.409 ccw(c92.405,70.155) 92.151,70.155 92.151,69.672 ccw(c92.761,69.672) 92.761,69.063 94.132,69.063 ccw(c94.132,70.942) 96.012,70.942 96.012,83.515 ccw(c95.072,83.515) 95.072,84.455 92.71,84.455
5V5 on Top Layer "5V5_L01_P046" (solid, pour order 46): 68.478,78.207 69.291,78.207 ccw(c69.291,79.019) 70.104,79.019 70.104,83.947 cw(c72.085,83.947) 72.085,85.928 85.573,85.928 cw(c85.573,83.388) 88.113,83.388 88.113,80.416 ccw(c88.875,80.416) 88.875,79.654 94.259,79.654 94.259,83.372 89.354,88.748 70.409,88.748 ccw(c70.409,86.208) 67.869,86.208 67.869,79.121 ccw(c68.834,79.121) 68.834,78.156
NetC6_2 on Top Layer "NETC6_2_L01_P000" (solid, pour order 0): 61.9,54.75 ccw(c61.85,54.8) 61.9,54.85 61.9,57.25 cw(c62.175,57.175) 62.25,57.45 67.825,57.45 ccw(c67.862,58.262) 68.656,58.085 cw(c68.932,58.149) 68.869,58.425 70.2,58.425 cw(c70.2,58.225) 70.4,58.225 70.4,56.625 cw(c69.275,56.625) 69.275,55.5 67.075,55.5 ccw(c67.175,55.263) 66.937,55.163 67.072,49.248 cw(c66.137,49.31) 66.075,48.375 61.9,48.375
VIN on Top Layer "VIN_L01_P036" (solid, pour order 36): 64.135,57.709 62.306,57.709 ccw(c62.306,56.972) 61.57,56.972 61.57,55.423 cw(c60.401,55.423) 60.401,54.254 59.512,54.254 cw(c59.512,56.286) 57.48,56.286 57.48,56.863 cw(c60.02,56.863) 60.02,59.403 63.238,59.403 ccw(c63.238,60.071) 63.906,60.071
VIN on Top Layer "VIN_L01_P044" (solid, pour order 44): 61.573,50.999 61.573,47.84 ccw(c63.532,47.913) 63.604,45.954 61.239,46.101 cw(c61.239,48.641) 58.699,48.641 58.699,50.546
VIN on Top Layer "VIN_L01_P043" (solid, pour order 43): 56.159,50.744 56.159,56.739 cw(c58.699,56.739) 58.699,59.279 59.215,59.279 cw(c59.277,56.982) 61.573,57.041 61.573,50.999 cw(c60.678,51.009) 60.687,50.113
VIN on Top Layer "VIN_L01_P040" (solid, pour order 40): 77.813,71.044 73.558,71.044 ccw(c73.635,69.939) 72.53,69.863 ccw(c72.53,70.206) 72.873,70.206 76.86,70.206
12V on Top Layer "12V_L01_P015" (solid, pour order 15): 60.566,59.538 60.528,59.538 59.595,59.538 59.135,59.538 58.905,59.538 58.674,59.538 cw(c58.714,60.568) 57.683,60.579 57.683,72.619 ccw(c55.143,72.619) 55.143,75.159 48.082,75.159 cw(c48.082,75.794) 47.447,75.794 47.447,78.892 cw(c48.108,78.892) 48.108,79.553 56.693,79.553 ccw(c56.693,81.051) 58.191,81.051 60.833,81.051 cw(c60.965,80.523) 61.493,80.654 61.493,63.904 cw(c61.564,62.887) 61.608,63.905 cw(c61.639,62.886) 61.671,63.905 cw(c61.697,63.07) 61.737,63.905 cw(c61.794,62.914) 62.049,63.873 cw(c61.895,63.143) 62.329,63.75 cw(c61.558,62.633) 62.534,63.576 cw(c60.995,62.148) 62.992,62.796 62.992,59.766 cw(c62.763,59.766) 62.763,59.538 60.63,59.538
12V on Top Layer "12V_L01_P016" (solid, pour order 16): 58.191,81.051 58.191,84.277 cw(c59.411,84.277) 59.411,85.496 60.503,85.496 cw(c60.503,84.455) 61.493,84.776 61.493,80.456
SW_1 on Top Layer "SW_1_L01_P006" (solid, pour order 6): 82.35,71.375 82.35,73.285 ccw(c79.81,73.285) 79.81,75.825 79.4,75.825 cw(c79.4,76.075) 79.15,76.075 79.15,81.075 cw(c79.625,81.075) 79.625,81.55 83.95,81.55 cw(c83.95,80.2) 85.3,80.2 85.3,77.1 ccw(c86.275,77.1) 86.275,76.125 93.4,76.125 cw(c93.4,75.275) 94.25,75.275 94.25,73.175 cw(c93.125,72.951) 94.25,72.727 cw(c92.986,72.833) 94.113,72.251 cw(c93.396,72.999) 93.773,72.034 cw(c93.074,74.433) 92.8,71.949 92.622,71.955 92.307,71.949 91.806,71.955 90.76,71.968 88.641,71.995 86.563,72.02 85.502,72.034 84.979,72.04 84.475,72.047 ccw(c84.598,71.548) 84.1,71.425 cw(c83.95,71.404) 84.071,71.313 cw(c83.99,71.379) 84,71.275 82.65,71.275 cw(c82.65,71.593) 82.332,71.593
SW_2 on Top Layer "SW_2_L01_P010" (solid, pour order 10): 84.025,49.45 ccw(c84.025,49.575) 84.15,49.575 84.15,49.775 cw(c85.4,49.775) 85.4,51.025 92.225,51.025 ccw(c92.225,52.825) 94.025,52.825 94.025,55.35 ccw(c92.9,55.35) 92.9,56.475 85.325,56.475 cw(c85.325,57.55) 84.25,57.55 ccw(c83.875,57.55) 83.875,57.925 78.975,57.925 ccw(c78.975,57.675) 78.725,57.675 78.725,52.55 ccw(c80.075,52.55) 80.075,51.2 82.075,51.2 cw(c82.075,50.9) 82.375,50.9 82.375,49.6 ccw(c82.525,49.6) 82.525,49.45
GND on Bottom Layer "GND_L02_P053" (solid, remove dead copper, pour order 53): 43.171,36.364 43.171,91.364 98.171,91.364 98.171,36.364

## Silkscreen, mask and mechanical layers (free items; w line width, h text height)
Top Overlay:
  text "8.2uH" at 90,85.006 h0.6
  text "5A" at 50.3,81.506 h0.6
  text "12k" at 63.3,53.3 h0.6
  text "8.2uH" at 90.5,50.206 h0.6
  text "3.3V" at 60.5,40.406 h0.6
  text "VIN" at 63.601,40.4 h0.6
  text "5V" at 58.7,40.306 h0.6
  text "GND" at 56.25,40.256 h0.6
Mechanical 1:
  the board outline again, w0.254

## Text inside footprints (layer, text, board x,y; h text height)
C1: Top Overlay "10uF" at 57.125,68.925 h0.25
C2: Top Overlay "10uF" at 57.125,73.225 h0.25
C3: Top Overlay "10uF" at 57.025,77.725 h0.25
C4: Top Overlay "10uF" at 57.025,83.125 h0.25
C6: Top Overlay "4.7nF" at 67.225,57.025 h0.25
C7: Top Overlay "0.1uF" at 74.32,76.149 h0.25
C8: Top Overlay "27nF" at 85.425,67.025 h0.25
C9: Top Overlay "4.7uF" at 66.466,71.064 h0.4
C11: Top Overlay "10uF" at 70.825,73.525 h0.25
C13: Top Overlay "47uF" at 81.325,88.525 h0.25
C14: Top Overlay "47uF" at 71.125,88.225 h0.25
C16: Top Overlay "47uF" at 76.425,88.425 h0.25
C17: Top Overlay "0.1uF" at 71.525,50.225 h0.25
C18: Top Overlay "27nF" at 86.225,44.725 h0.25
C20: Top Overlay "10uF" at 70.725,40.325 h0.25
C22: Top Overlay "0.1uF" at 65.625,41.225 h0.25
C23: Top Overlay "47uF" at 82.625,63.525 h0.25
C25: Top Overlay "47uF" at 79.275,63.525 h0.25
C26: Top Overlay "47uF" at 76.275,63.525 h0.25
D1: Top Overlay "C" at 57.325,49.8 h0.13; Top Overlay "Zener_doide" at 60.151,51.593 h0.25
D4: Top Overlay "blue_led" at 67.451,63.993 h0.25
R2: Top Overlay "84.5k" at 74.651,67.226 h0.25
R3: Top Overlay "100k" at 92.951,65.951 h0.25
R4: Top Overlay "17.8k" at 88.551,65.851 h0.25
R5: Top Overlay "84.5k" at 76.051,43.051 h0.25
R6: Top Overlay "91k" at 92.825,43.925 h0.25
R7: Top Overlay "27.1k" at 89.125,44.125 h0.25
R8: Top Overlay "220" at 68.925,80.425 h0.25
R9: Top Overlay "68" at 73.425,64.025 h0.25
R10: Top Overlay "1.8k" at 65.225,63.925 h0.25
U1: Top Overlay "LMR14050SDDAR" at 78.751,73.451 h0.25; Top Overlay "12V_3.3" at 79.471,72.97 h0.25
U2: Top Overlay "12V_3.3" at 79.751,43.393 h0.25; Top Overlay "LMR14050SDDAR" at 79.6,44.503 h0.25
U3: Top Overlay "p_mosfet" at 59.334,62.713 h0.38